# Altium PCB RTL8201CP.PcbDoc
Units mm, origin at the board's own origin, x right, y up, seen from the top; angles counter-clockwise.
Board outline 50 x 24 mm, 2 copper layers (Top Layer, Bottom Layer), stack 0.246 mm thick; 39 components, 39 nets, 159 pads, 125 vias.
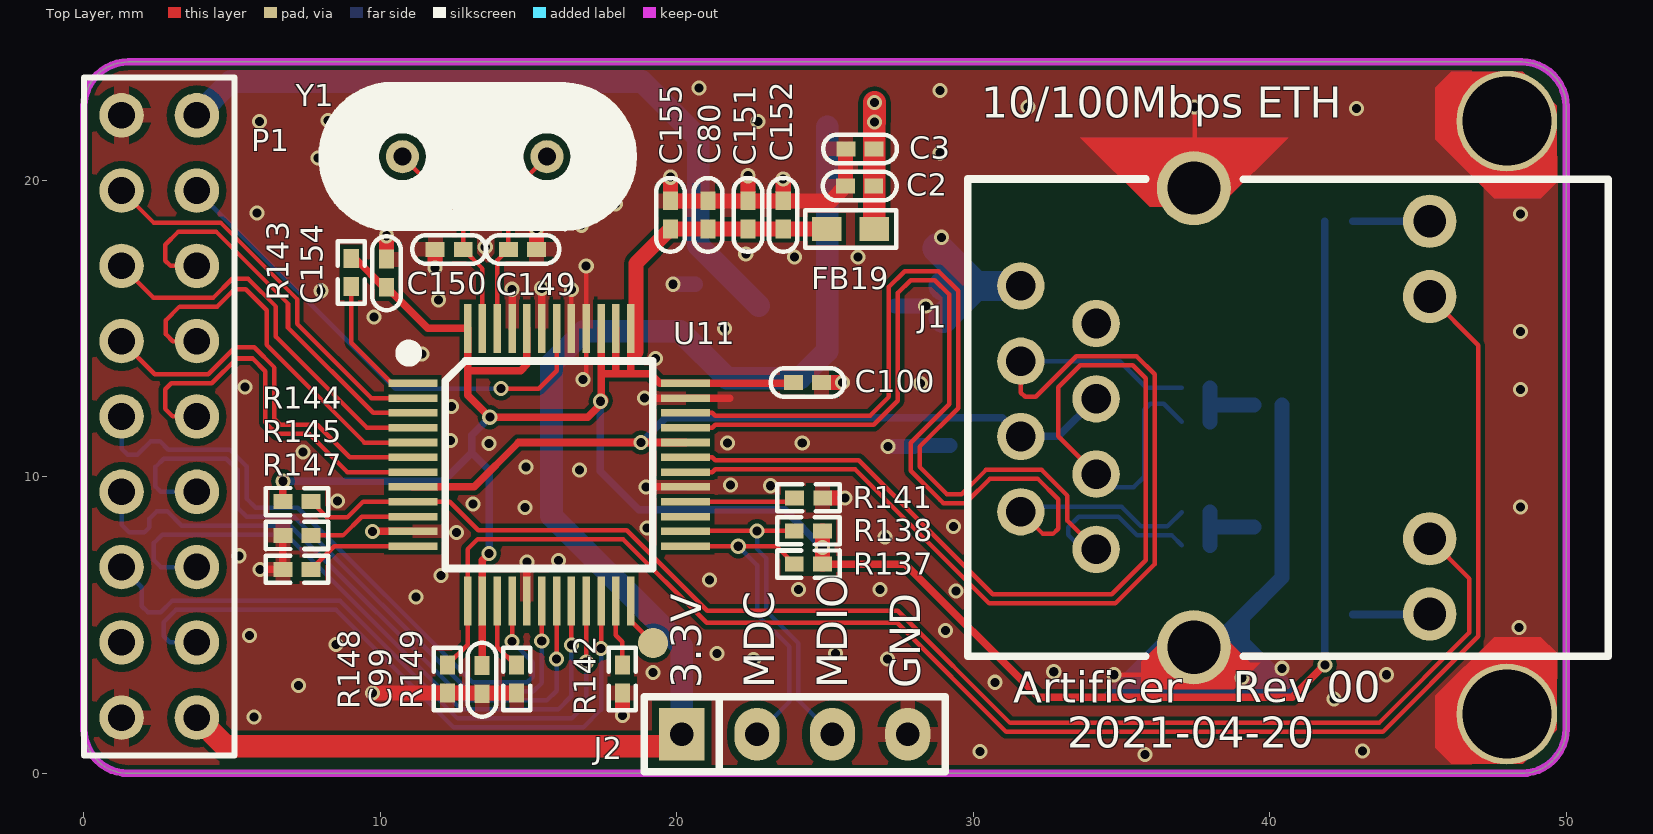
[diagram p0: Top Layer view]
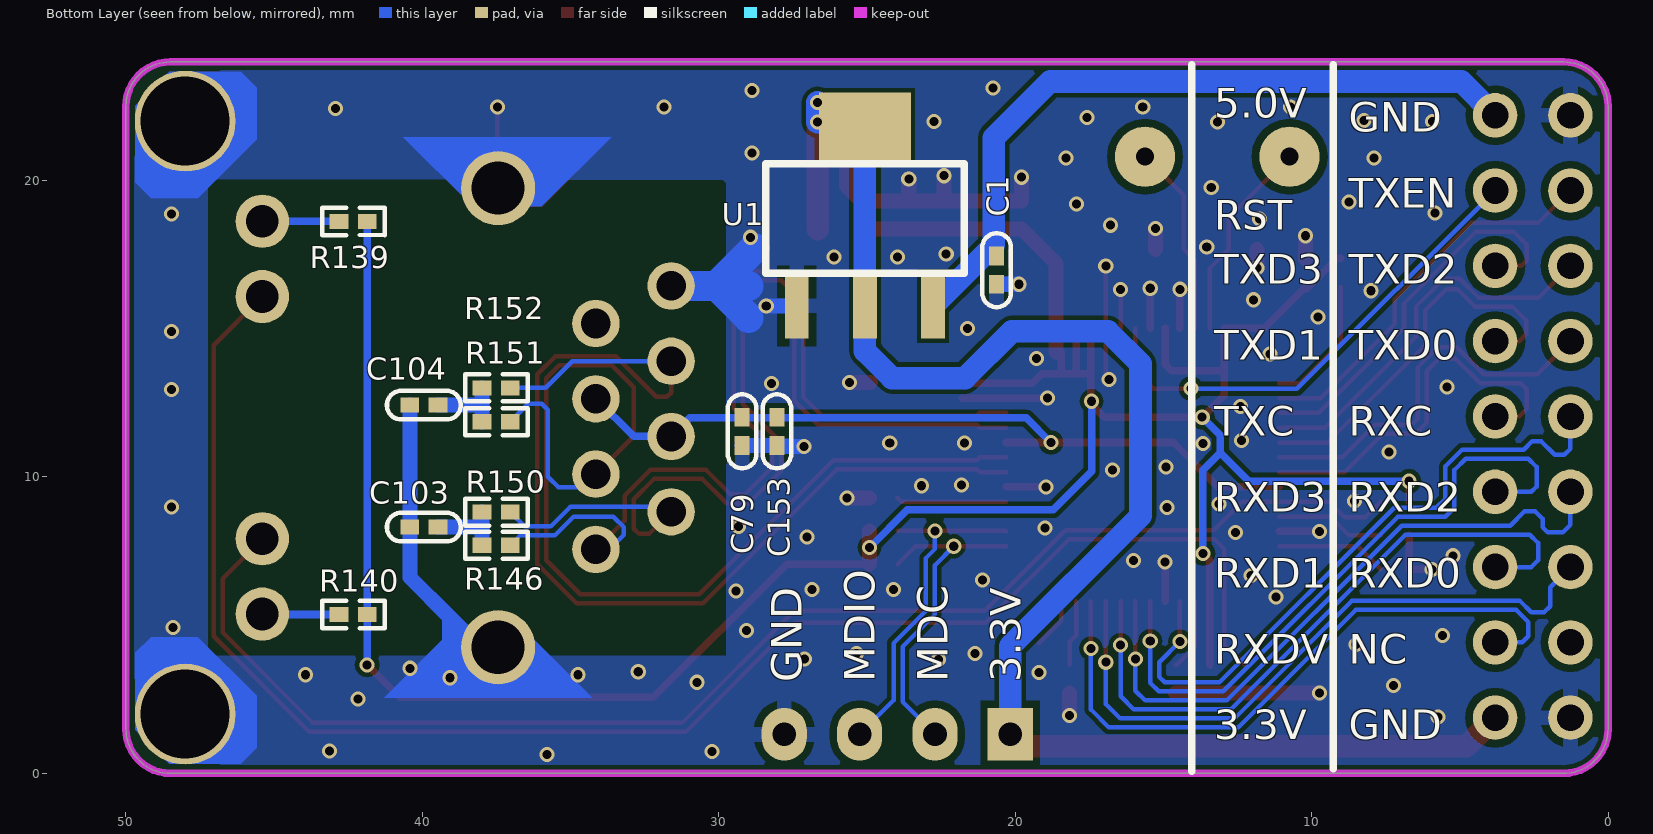
[diagram p1: Bottom Layer view, seen from below]

## Layer stack, top to bottom
Top Solder: solder mask 0.0127, Solder Resist, Dk 3.5
Top Layer: signal copper 0.0356
Dielectric 1: core 0.175, 7628, Dk 4.29
Bottom Layer: signal copper 0.0356
Bottom Solder: solder mask 0.0127, Solder Resist, Dk 3.5

## Board outline
0,1.5 0,22.5 cw(c1.5,22.5) 1.5,24 48.5,24 cw(c48.5,22.5) 50,22.5 50,1.5 cw(c48.5,1.5) 48.5,0 1.5,0 cw(c1.5,1.5)

## Design rules (kind name [scope] priority, off if disabled: settings)
Clearance [All] p1: gap=0.152 except(0.254: THPad-Fill THPad-Poly Fill-Fill Poly-Poly)
ComponentClearance [All] p1 off: gap=0.152 collisioncheckmode=3 verticalgap=0.152 showdistances=FALSE
DiffPairsRouting [All] p1: maxlimit=0.152 minlimit=0.152 mostfreqgap=0.152 toplayer_minwidth=0.152 toplayer_maxwidth=0.152 toplayer_prefwidth=0.152 bottomlayer_minwidth=0.152 bottomlayer_maxwidth=0.152 bottomlayer_prefwidth=0.152 maxuncoupledlength=12.7
Height [All] p1: minheight=0 maxheight=35 prefheight=12.7
HoleSize [All] p1: absolutevalues=TRUE maxlimit=3.5 minlimit=0.2 maxpercent=80.000 minpercent=20.000
HoleToHoleClearance [All] p1 off: gap=0.254 allowstackedmicrovias=TRUE
Length [InNet('DDR2_A0')] p1: maxlimit=36 minlimit=0
Length InNet('DDR2_A0') [InNet('DDR2_A0')] p2: maxlimit=33.585 minlimit=0
Length InNet('DDR2_A4') [InNet('DDR2_A0')] p3: maxlimit=33.585 minlimit=0
Length "InNet('DDR2_A0') Or InNet('DDR2_A4')" [InNet('DDR2_A2')] p4: maxlimit=33.585 minlimit=0
MinimumSolderMaskSliver [All] p1 off: minsoldermaskwidth=0.254
PolygonConnect PolygonConnect_GND [IsVia] p1: connectstyle=Direct reliefconductorwidth=0.254 reliefentries=4 polygonreliefangle="90 Angle" airgapwidth=0.254
PolygonConnect [All] p2: connectstyle=Relief reliefconductorwidth=0.508 reliefentries=4 polygonreliefangle="90 Angle" airgapwidth=0.254
RoutingVias [All] p1: holewidth=0.305 width=0.508 viastyle="Through Hole" minholewidth=0.305 minwidth=0.508 maxholewidth=0.762 maxwidth=1.27
SilkToSilkClearance [All] p1 off: silktosilkclearance=0.254
SilkToSolderMaskClearance [IsPad] p1 off: minsilkscreentomaskgap=0.254 clearancetoexposedcopper=TRUE
SolderMaskExpansion [All] p1: expansion=0.102
Width [All] p1: maxlimit=2 minlimit=0.152 preferedwidth=0.152
22 further rules are at their usual default settings.

## Classes and differential pairs
net class ETH_RX: TPRX_N TPRX_P
net class ETH_TX: TPTX_N TPTX_P
net class MII_TX: ETH_TXC ETH_TXD0 ETH_TXD1 ETH_TXD2 ETH_TXD3 ETH_TXEN
net class MII_RX: ETH_RXC ETH_RXD0 ETH_RXD1 ETH_RXD2 ETH_RXD3 ETH_RXDV
differential pair TPTX: +TPTX_P -TPTX_N
differential pair TPRX: +TPRX_P -TPRX_N

## Components (designator, comment, footprint, x,y, rotation, side; value= is the part's Value field where it differs from the comment)
C1 "10uF/10V" 0402C 20.617,16.492 r90 bottom
C2 "10uF/10V" 0402C 25.687,19.804 r0 top
C3 "0.1uF/16V" 0402C 25.698,21.06 r0 top
C79 "0.1uF/16V" 0402C 29.202,11.057 r90 bottom
C80 "0.1uF/16V" 0402C 21.042,19.322 r270 top
C99 "0.1uF/16V" 0402C 13.438,2.677 r90 top
C100 "0.1uF/16V" 0402C 24.893,13.19 r180 top
C103 "0.1uF/16V" 0402C 40.429,8.298 r180 bottom
C104 "0.1uF/16V" 0402C 40.429,12.413 r180 bottom
C149 "20pF/50V" 0402C 14.311,17.671 r0 top
C150 "20pF/50V" 0402C 11.837,17.671 r0 top
C151 "10uF/10V" 0402C 22.389,19.322 r270 top
C152 "0.1uF/16V" 0402C 23.582,19.322 r270 top
C153 "2.2uF/10V" 0402C 28.034,11.057 r90 bottom
C154 "0.1uF/16V" 0402C 10.203,17.356 r270 top
C155 "0.1uF/16V" 0402C 19.772,19.322 r270 top
FB19 "120R_3A" 0603 26.663,18.364 r180 top
J1 "HR911105A_C12074" RJ45-TH_HR911105A 38.5,12 r90 top locked
J2 "SIP4" SIP4 23.978,1.321 r0 top locked
P1 "Header 9X2" HDR2X9 1.27,22.2 r270 top locked
R137 "10K" 0402R 24.428,7.061 r0 top
R138 "10K" 0402R 24.428,8.179 r0 top
R139 "330R" 0402R 42.342,18.618 r180 bottom
R140 "330R" 0402R 42.342,5.359 r180 bottom
R141 "6.8K" 0402R 24.454,9.296 r180 top
R142 "10K" 0402R 18.161,3.192 r270 top
R143 "10K" 0402R 9.017,16.891 r90 top
R144 "10K" 0402R 7.197,9.169 r180 top
R145 "10K" 0402R 7.197,8.026 r180 top
R146 "49.9R±1%" 0402R 37.516,7.696 r180 bottom
R147 "10K" 0402R 7.197,6.883 r180 top
R148 "10K" 0402R 12.262,3.192 r270 top
R149 "10K" 0402R 14.598,3.192 r270 top
R150 "49.9R±1%" 0402R 37.516,8.814 r180 bottom
R151 "49.9R±1%" 0402R 37.516,11.862 r180 bottom
R152 "49.9R±1%" 0402R 37.516,13.005 r180 bottom
U1 "AMS1117-1.8V" SOT-223 27.362,15.765 r180 bottom
U11 "RTL8201CP" lqfp48s 11.084,13.154 r0 top locked
Y1 "25MHz" HC-49S 15.646,20.777 r180 top

## Footprints (in the part's own frame and the unit in brackets; to place one, negate y for a bottom-side part, rotate by r counter-clockwise, add the part's x,y. Pads: shape width x height; smd on the part's side, far side on the other; paste and mask are expansions set on the pad)
0402C [mil]
  rect 25x20 smd: 1(0.3,0.3) 2(37.7,0.3)
  silkscreen extent -30,-19 68,19
0402R [mil]
  rect 25x20 smd: 1(-18.4,0) 2(19,0)
  silkscreen extent -41,-18 42,18
0603 [mm]
  rect 1x0.8 smd: 1(0,0) 2(1.6,0)
  silkscreen extent -0.74,-0.64 2.34,0.64, body extent -0.04,-0.4 1.56,0.4, height 0.45
HC-49S [mil]
  round 44 / inner round 100 / far side round 80 hole 24: 1(1,-1) 2(193,-1)
  silkscreen extent -115,-96 301,94
HDR2X9 [mm] "Connector; Header; 9x2 Position"
  round 1.5 hole 0.9: 1(0,0) 2(0,2.54) 3(2.54,0) 4(2.54,2.54) 5(5.08,0) 6(5.08,2.54) 7(7.62,0) 8(7.62,2.54) 9(10.16,0) 10(10.16,2.54) 11(12.7,0) 12(12.7,2.54) 13(15.24,0) 14(15.24,2.54) 15(17.78,0) 16(17.78,2.54) 17(20.32,0) 18(20.32,2.54)
  silkscreen extent -1.27,-1.27 21.59,3.81
lqfp48s [mil]
  rect 65x10 smd: 1(0.42,0.29) 2(0.42,-19.39) 3(0.42,-39.08) 4(0.42,-58.76) 5(0.42,-78.45) 6(0.42,-98.13) 7(0.42,-117.82) 8(0.42,-137.5) 9(0.42,-157.19) 10(0.42,-176.87) 11(0.42,-196.56) 12(0.42,-216.24) 25(362.63,-216.24) 26(362.63,-196.56) 27(362.63,-176.87) 28(362.63,-157.19) 29(362.63,-137.5) 30(362.63,-117.82) 31(362.63,-98.13) 32(362.63,-78.45) 33(362.63,-58.76) 34(362.63,-39.08) 35(362.63,-19.39) 36(362.63,0.29)
  rect 10x65 smd: 13(73.26,-289.08) 14(92.94,-289.08) 15(112.63,-289.08) 16(132.31,-289.08) 17(152,-289.08) 18(171.68,-289.08) 19(191.37,-289.08) 20(211.05,-289.08) 21(230.74,-289.08) 22(250.42,-289.08) 23(270.11,-289.08) 24(289.79,-289.08) 37(289.79,73.13) 38(270.11,73.13) 39(250.42,73.13) 40(230.74,73.13) 41(211.05,73.13) 42(191.37,73.13) 43(171.68,73.13) 44(152,73.13) 45(132.31,73.13) 46(112.63,73.13) 47(92.94,73.13) 48(73.26,73.13)
  silkscreen extent -10,-246 319,46
RJ45-TH_HR911105A [mm]
  round 1.6 hole 1: 1(-4.445,4.355) 2(-3.175,6.895) 3(-1.905,4.355) 4(-0.635,6.895) 5(0.635,4.355) 6(1.905,6.895) 7(3.175,4.355) 8(4.445,6.895)
  round 1.8 hole 1.1: 9(-6.625,-6.895) 10(-4.085,-6.895) 11(4.085,-6.895) 12(6.625,-6.895)
  round 2.5 hole 1.8: SH1(-7.745,1.055) SH2(7.745,1.055)
  silkscreen extent -8.05,-12.92 8.05,8.68
SIP4 [mil]
  rect 60x70 hole 31.5: 1(-150,0)
  oval 60x70 hole 31.5: 2(-50,0) 3(50,0) 4(150,0)
  silkscreen extent -200,-50 200,50
SOT-223 [mm]
  rect 0.8x2.2 smd: 1(-0.008,0.004) 2(2.292,0.004) 3(4.592,0.004)
  rect 3.1x2.3 smd: 4(2.292,6.054)
  silkscreen extent -1.06,1.1 5.64,4.8

## Part data
C1 C2 C151: library part CT41-25V-0805-106, "10uF_10%_X5R_25V"
C3 C79 C80 C99 C100 C152 C153 C154 C155: library part CT41-50V-0805-104, "0.1uF_10%_X5R_50V"
C103 C104 C149 C150: library part CAP, "Capacitor"
FB19: library part FB-90R-100Mhz
J2: library part CON4
P1: "Header, 9-Pin, Dual row"
R137 R138 R141 R142 R143 R144 R145 R147 R148 R149: library part RC-0805-0R, "0R_5%_1/16W"
R139 R140 R146 R150 R151 R152: library part RES
U1: "稳压器1.8V"
U11: "ETH PHY"
Y1: library part CRYES

## Free pads (board coordinates)
  round 3.4 hole 3: 1(48,2) 1(48,22)
  round 1.016 smd: 2(19.202,4.394)

## Via types
v1: diameter 0.508, hole 0.305, Top Layer to Bottom Layer, tented both sides, 125 vias

## Nets (pads, with @x,y where several pads share a name; then routed paths per layer and width w, separated by ;. In a path a pad name is that pad's centre, name@x,y a point inside that pad or via, vN(x,y) a via of type N, cw(c..) or ccw(c..) an arc to the next point about the centre after c; other vN are vias at no path point)
ATC_LED1: J1.11 R148.1 U11.13 | length 54.6
  Top Layer w0.152: R148.1 12.945,4.343 U11.13 12.945,7.566 13.278,7.9 18.187,7.9 21.008,5.08 27.434,5.08 31.116,1.398 43.814,1.398 47.04,4.624 47.04,14.44 J1.11
ETH_MDC: J2.2 R137.1 U11.25 | length 11.4
  Top Layer w0.152: U11.25 v1(22.073,7.661) 23.361,7.661 R137.1
  Bottom Layer w0.152: v1(22.073,7.661) 22.708,7.026 22.708,5.361 23.8,4.269 23.8,2.413 J2.2
ETH_MDIO: J2.3 R138.1 U11.26 | length 11.6
  Top Layer w0.152: U11.26 20.312,8.179 v1(22.708,8.179) 23.926,8.179 23.943,8.161 R138.1
  Bottom Layer w0.152: v1(22.708,8.179) 22.708,7.569 23.012,7.265 23.012,5.487 24.104,4.395 24.104,2.465 J2.3
ETH_RESET: P1.4 U11.42 | length 16.6
  Top Layer w0.152: v1(14.072,12.979) 15.342,12.979 15.945,13.582 U11.42
  Bottom Layer w0.152: P1.4 10.497,12.973 v1@14.072,12.973
ETH_RXC: P1.9 U11.16 | length 22.2
  Top Layer w0.152: v1(14.445,4.446) U11.16
  Bottom Layer w0.152: P1.9 1.27,10.947 1.473,10.744 1.803,10.744 2.261,11.201 2.565,11.201 2.845,10.922 4.926,10.922 5.486,10.362 5.486,9.272 5.793,8.965 7.213,8.965 13.109,3.069 14.957,3.069 15.141,3.253 15.141,3.75 v1(14.445,4.446)
ETH_RXD0: P1.13 U11.21 | length 22.2
  Top Layer w0.152: v1(16.945,3.75) U11.21
  Bottom Layer w0.152: P1.13 1.956,6.274 1.956,5.639 2.159,5.436 2.593,5.436 2.974,5.817 8.642,5.817 12.605,1.853 16.458,1.853 16.945,2.34 v1(16.945,3.75)
ETH_RXD1: P1.14 U11.20 | length 22.2
  Top Layer w0.152: v1(16.445,4.326) U11.20
  Bottom Layer w0.152: P1.14 2.591,6.96 2.362,7.188 2.362,7.772 2.642,8.053 6.836,8.053 12.731,2.157 16,2.157 16.445,2.602 v1(16.445,4.326)
ETH_RXD2: P1.11 U11.19 | length 22.2
  Top Layer w0.152: v1(15.945,3.861) U11.19
  Bottom Layer w0.152: P1.11 1.27,8.382 1.524,8.128 2.032,8.128 2.21,8.306 2.21,8.585 2.464,8.839 2.819,8.839 3.302,8.357 6.961,8.357 12.857,2.461 15.619,2.461 15.945,2.787 v1(15.945,3.861)
ETH_RXD3: P1.12 U11.18 | length 22.2
  Top Layer w0.152: v1(15.445,4.462) U11.18
  Bottom Layer w0.152: P1.12 2.591,9.5 2.413,9.677 2.413,10.338 2.693,10.618 4.8,10.618 5.182,10.236 5.182,8.966 5.487,8.661 7.087,8.661 12.983,2.765 15.161,2.765 15.445,3.049 v1(15.445,4.462)
ETH_RXDV: P1.16 U11.22 | length 22.2
  Top Layer w0.152: v1(17.445,4.218) U11.22
  Bottom Layer w0.152: P1.16 2.896,4.42 2.692,4.623 2.692,5.105 3.1,5.513 8.516,5.513 12.479,1.549 16.84,1.549 17.445,2.154 v1(17.445,4.218)
ETH_TXC: P1.10 U11.7 | length 13.2
  Top Layer w0.152: P1.10 2.997,12.04 2.743,12.294 2.743,12.954 2.947,13.158 4.317,13.158 5.154,13.995 5.691,13.995 6.122,13.565 6.122,11.837 6.504,11.455 7.595,11.455 8.889,10.161 U11.7
ETH_TXD0: P1.7 U11.6 | length 13.2
  Top Layer w0.152: P1.7 2.388,13.462 4.191,13.462 5.105,14.376 5.74,14.376 6.426,13.691 6.426,11.963 6.63,11.759 7.875,11.759 8.973,10.661 U11.6
ETH_TXD1: P1.8 U11.5 | length 13.2
  Top Layer w0.152: P1.8 2.997,14.58 2.769,14.808 2.769,15.291 3.227,15.749 4.497,15.749 5.081,16.333 5.462,16.333 6.173,15.622 6.173,14.452 9.463,11.161 U11.5
ETH_TXD2: P1.5 U11.4 | length 13.2
  Top Layer w0.152: P1.5 2.337,16.053 4.369,16.053 5.004,16.688 5.537,16.688 6.477,15.748 6.477,14.732 9.548,11.661 U11.4
ETH_TXD3: P1.6 U11.3 | length 13.2
  Top Layer w0.152: P1.6 2.921,17.12 2.743,17.297 2.743,17.831 3.176,18.263 4.47,18.263 6.884,15.849 6.884,15.036 9.759,12.161 U11.3
ETH_TXEN: P1.3 U11.2 | length 13.2
  Top Layer w0.152: P1.3 2.362,18.567 4.623,18.567 7.188,16.002 7.188,15.164 9.691,12.661 U11.2
GND: C1.1 C2.1 C3.1 C79.1 C80.1 C99.1 C100.1 C103.1 C104.1 C149.2 C150.1 C151.1 C152.1 C153.1 C154.1 C155.1 J1.8 J1.SH1 J1.SH2 J2.4 P1.1 P1.17 pad.1 R141.1 R142.2 R145.2 R147.2 R148.2 R149.2 U1.1 U11.11 U11.17 U11.29 U11.35 U11.40 U11.41 U11.43 U11.45 | length 63.4
  Top Layer w0.152: U11.41 v1(16.445,16.321) ; v1(16.84,13.284) 16.945,13.389 U11.40 v1(16.945,17.117) ; v1(34.747,3.327) 36.517,3.327 J1.SH1 38.036,4.255 v1(39.065,3.226) ; J1.SH2 37.465,19.765 v1(37.465,22.479)
  Top Layer w0.254: v1(5.944,6.883) R147.2 R145.2 ; v1(9.73,8.161) U11.11 ; U11.45 v1(14.445,16.331) ; U11.17 v1(14.945,7.137) ; U11.43 v1(15.445,16.366) ; v1(18.903,12.661) U11.35 21.781,12.661 ; v1(18.958,9.661) U11.29
  Top Layer w0.508: v1(9.736,2.71) R148.2 R149.2 ; C154.1 v1(10.211,18.136) ; v1(11.845,17.052) C150.1 ; C149.2 v1(15.269,18.386) ; v1(18.161,1.956) R142.2 ; v1(19.78,20.11) C155.1 C80.1 C151.1 ; v1(22.396,20.161) C151.1 ; v1(23.59,20.047) C152.1 ; C100.1 v1(25.597,13.183) ; R141.1 v1(25.673,9.296) ; C3.1 25.695,21.057 C2.1 25.197,19.314 C152.1 ; C151.1 C152.1
  Bottom Layer w0.508: v1(19.878,16.5) C1.1 ; v1(27.127,11.024) 28.001,11.024 C153.1 C79.1 ; U1.1 27.375,15.773 v1(28.397,15.773) ; J1.SH1@38.024,4.216 39.078,5.271 ; 39.078,4.381 39.078,5.271 ; C104.1 C103.1 40.422,6.614 39.078,5.271
  Bottom Layer w1.016: 28.804,17.715 30.074,16.445 ; 28.993,16.445 30.074,16.445 ; 28.996,15.367 30.074,16.445 ; J1.8 30.074,16.445
  other v1: 35.789,0.635 30.226,0.737 43.129,0.762 5.74,1.905 42.164,2.515 7.239,2.972 30.734,3.073 43.942,3.327 19.202,3.404 32.715,3.429 40.422,3.546 22.581,3.835 27.102,3.861 21.361,4.039 25.349,4.039 8.509,4.343 5.588,4.648 29.058,4.826 48.412,4.928 11.201,5.944 29.413,6.147 24.105,6.198 26.848,6.198 21.107,6.528 12.04,6.68 16.002,7.188 5.232,7.341 27.026,7.976 12.573,8.128 18.999,8.28 29.337,8.331 14.884,8.966 48.463,8.992 13.132,9.093 8.56,9.195 23.165,9.703 21.819,9.728 16.713,10.236 14.91,10.338 7.391,10.846 13.665,11.125 21.717,11.151 24.232,11.151 12.37,11.227 12.395,12.37 48.463,12.954 5.436,13.03 28.219,13.157 19.279,13.995 11.405,14.148 48.463,14.91 21.615,15.011 9.779,15.392 11.963,15.977 8.001,16.281 23.978,17.424 26.111,17.424 22.327,17.526 13.538,17.755 28.931,18.085 16.789,18.491 11.76,18.694 48.463,18.872 5.842,18.898 17.932,19.202 8.738,19.279 13.386,19.761 7.899,20.752 18.288,20.752 28.88,20.93 13.183,21.971 5.918,21.996 22.733,21.996 8.23,22.022 17.577,22.123 42.926,22.428 10.719,22.479 15.697,22.479 31.852,22.479 28.88,23.038 20.752,23.114
LINK_LED1: J1.10 R144.1 U11.9 | length 47.6
  Top Layer w0.152: R144.1 8.198,8.636 8.89,8.636 9.415,9.161 U11.9 12.346,9.161 13.303,8.204 18.313,8.204 21.031,5.486 27.457,5.486 31.242,1.702 43.688,1.702 46.736,4.75 46.736,6.574 J1.10
NetC103_2: C103.2 R146.1 R150.1 | length 2.6
  Bottom Layer w0.508: R146.1 37.983,8.255 ; R150.1 37.983,8.255 ; C103.2 38.034,8.306 37.983,8.255
NetC104_2: C104.2 R151.1 R152.1 | length 2.6
  Bottom Layer w0.508: R151.1 37.983,12.421 ; R152.1 37.983,12.421 ; C104.2 37.983,12.421
NetJ1_9: J1.9 R140.1 | length 2.6
  Bottom Layer w0.254: R140.1 45.379,5.359 J1.9
NetJ1_12: J1.12 R139.1 | length 2.6
  Bottom Layer w0.254: R139.1 45.388,18.618 J1.12
NetR141_2: R141.2 U11.28 | length 3.7
  Top Layer w0.152: U11.28 23.836,9.161 R141.2
NetR142_1: R142.1 U11.23 | length 2.2
  Top Layer w0.152: U11.23 17.945,4.661 18.161,4.445 R142.1
NetR143_1: R143.1 U11.1 | length 4.5
  Top Layer w0.152: R143.1 9.017,14.529 10.384,13.161 U11.1
NetR145_1: R145.1 U11.10 | length 3.7
  Top Layer w0.152: R145.1 8.738,8.026 9.373,8.661 U11.10
NetR147_1: R147.1 U11.12 | length 3.8
  Top Layer w0.152: R147.1 8.442,7.661 U11.12
NetR149_1: R149.1 U11.15 | length 2.5
  Top Layer w0.152: U11.15 13.945,4.265 14.55,3.66 R149.1
REGOUT: C79.2 C153.2 J1.4 J1.5 U11.8 U11.32 | length 26.3
  Top Layer w0.254: U11.8 13.16,9.661 14.66,11.161 v1(18.796,11.161) U11.32
  Bottom Layer w0.254: v1(18.796,11.161) 19.623,11.989 30.981,11.989 J1.4 32.875,11.365 J1.5
RXER: pad.2 U11.24 | length 1.7
  Top Layer w0.152: U11.24 18.445,5.152 pad.2
TPRX_N: J1.6 R152.2 U11.30 | length 36.8
  Top Layer w0.152: U11.30 21.196,10.161 21.294,10.259 26.014,10.259 30.533,5.74 34.798,5.74 36.119,7.061 36.119,13.46 35.508,14.071 33.478,14.071 32.107,12.7 31.75,12.7 31.605,12.845 J1.6@31.605,13.721
  Bottom Layer w0.152: J1.6 34.939,13.905 35.839,13.005 R152.2
TPRX_P: J1.3 R151.2 U11.31 | length 36.8
  Top Layer w0.152: U11.31 21.196,10.661 21.294,10.563 26.14,10.563 30.659,6.044 34.672,6.044 35.815,7.187 35.815,13.334 35.382,13.767 33.604,13.767 32.868,13.03 32.868,11.372 J1.3
  Bottom Layer w0.152: J1.3 34.588,9.652 35.408,9.652 35.763,10.008 35.763,12.268 35.966,12.471 36.424,12.471 R151.2
TPTX_N: J1.2 R150.2 U11.33 | length 34.4
  Top Layer w0.152: U11.33 21.196,11.661 21.294,11.759 26.644,11.759 27.457,12.572 27.457,16.206 27.888,16.638 28.703,16.638 29.185,16.155 29.185,12.447 27.89,11.151 27.89,10.212 28.893,9.208 28.982,9.119 29.742,9.119 29.831,9.208 30.555,9.932 32.183,9.932 32.868,9.247 32.868,8.255 32.69,8.077 32.353,8.077 J1.2
  Bottom Layer w0.152: J1.2 31.772,8.992 35.001,8.992 35.662,8.33 36.55,8.33 R150.2
TPTX_P: J1.1 R146.2 U11.34 | length 34.4
  Top Layer w0.152: U11.34 21.196,12.161 21.294,12.063 26.518,12.063 27.153,12.698 27.153,16.408 27.686,16.942 28.829,16.942 29.489,16.281 29.489,12.321 28.194,11.025 28.194,10.338 29.108,9.423 29.616,9.423 30.429,10.236 32.309,10.236 33.172,9.373 33.172,8.528 J1.1
  Bottom Layer w0.152: J1.1@34.286,7.696 J1.1 33.695,7.555 33.198,8.052 33.198,8.306 33.553,8.661 34.9,8.661 35.535,8.026 36.703,8.026 R146.2
VCC3.3: C2.2 C3.2 FB19.1 J2.1 P1.18 U1.2 U1.4 | length 54.5
  Top Layer w0.762: P1.18 4.775,0.914 19.761,0.914 J2.1 ; FB19.1 26.663,21.964 v1(26.67,21.971) v1(26.67,22.631)
  Bottom Layer w0.762: J2.1 20.168,4.293 15.773,8.687 15.773,13.818 16.866,14.91 20.117,14.91 21.692,13.335 24.155,13.335 25.07,14.249 U1.2 U1.4 ; v1(26.67,21.971) v1(26.67,22.631)
VCC3.3_ETH: C80.2 C99.2 C100.2 C151.2 C152.2 C154.2 C155.2 FB19.2 R137.2 R138.2 R139.2 R140.2 R143.2 R144.2 U11.14 U11.36 U11.37 U11.38 U11.39 U11.44 U11.48 | length 99.5
  Top Layer w0.152: C99.2 C99.2@13.445,3.649 ; C100.2@23.914,13.161 C100.2
  Top Layer w0.254: R144.2 v1(6.714,9.855) ; R143.2 9.144,17.374 C154.2@10.165,16.353 ; C154.2 11.598,15.011 U11.48 12.945,13.614 ; C99.2@13.445,3.649 U11.14 13.445,7.196 v1(13.665,7.417) ; U11.44 14.945,13.802 14.732,13.589 12.97,13.589 12.945,13.614 ; U11.39 17.445,13.487 ; U11.38 17.945,13.5 17.932,13.487 ; U11.37@18.445,14.224 18.445,13.492 18.44,13.487 ; C100.2@23.914,13.161 U11.36 19.427,13.161 19.101,13.487 18.44,13.487 ; R137.2 27.711,7.061 32.207,2.565 40.767,2.565 v1(41.859,3.658) ; 12.945,13.614 12.945,12.76 v1(13.691,12.014) 16.993,12.014 17.445,12.466 17.445,12.573 17.445,13.487 ; 17.445,13.487 17.932,13.487 ; 17.932,13.487 18.44,13.487
  Top Layer w0.508: v1(17.424,12.553) v1@17.445,12.573 ; 18.618,14.224 18.618,17.202 C155.2 C80.2 FB19.2 ; R137.2 v1(24.911,7.62) R138.2
  Bottom Layer w0.254: v1(6.714,9.855) 12.124,9.855 13.081,10.812 ; v1(13.665,7.417) 13.665,10.228 13.081,10.812 ; v1(13.691,12.014) 13.081,11.405 13.081,10.812 ; v1(17.424,12.553) 17.424,10.185 18.72,8.89 23.641,8.89 v1(24.911,7.62) ; v1(41.859,3.658) R140.2 R139.2
VCC5.0: C1.2 P1.2 U1.3 | length 24.7
  Bottom Layer w0.762: P1.2 4.95,23.34 18.824,23.34 20.726,21.438 20.726,17.812 U1.3
XTLN1: C149.1 U11.46 Y1.1 | length 6.5
  Top Layer w0.152: U11.46 13.945,17.304 C149.1 14.319,19.501 Y1.1
XTLP1: C150.2 U11.47 Y1.2 | length 6.9
  Top Layer w0.152: Y1.2 12.795,18.752 C150.2 13.445,17.029 U11.47
pads on no net: J1.7 P1.15 U11.27

## Polygon pours and split planes (outlines as drawn)
GND on Bottom Layer "Bottom Layer-No Net" (solid, pour order 0): -0.025,0 0.025,-0.051 49.936,-0.051 49.936,23.851 50.038,23.952 49.962,24.028 -0.102,24.028
GND on Top Layer "Bottom Layer-No Net" (solid, remove dead copper, pour order 2): -0.152,-0.051 49.886,-0.051 49.987,0.051 49.936,0.102 49.936,24.206 0.102,24.206 0.025,24.13

## Keep-outs
Keep-Out Layer:
  the board outline again, w0.254

## Other copper
Top Layer:
  region net GND: 47.574,19.403 45.593,21.384 45.593,23.136 46.126,23.67 48.539,23.67 49.682,22.527 49.682,19.936 49.149,19.403
  region net GND: 47.574,4.597 45.593,2.616 45.593,0.864 46.126,0.33 48.539,0.33 49.682,1.473 49.682,4.064 49.149,4.597
  region net GND: 33.61,21.443 35.946,19.106 38.283,19.106 40.62,21.443
  region net GND: 36.678,4.928 36.678,4.775 35.662,3.759 35.662,3.048 35.712,3.048 35.916,2.845 38.786,2.845 39.675,3.734 39.345,3.734 37.998,5.08
  pour cut-out: 29.87,20.015 29.769,19.914 29.769,3.988 47.168,3.988 47.219,3.937 47.219,20.041
Bottom Layer:
  region net GND: 47.574,19.403 45.593,21.384 45.593,23.136 46.126,23.67 48.539,23.67 49.682,22.527 49.682,19.936 49.149,19.403
  region net GND: 47.574,4.597 45.593,2.616 45.593,0.864 46.126,0.33 48.539,0.33 49.682,1.473 49.682,4.064 49.149,4.597
  region net GND: 41.28,2.557 38.944,4.894 36.607,4.894 34.27,2.557
  region net GND: 33.63,21.463 35.966,19.126 38.303,19.126 40.64,21.463
  pour cut-out: 29.87,20.015 29.769,19.914 29.769,3.988 47.168,3.988 47.219,3.937 47.219,20.041

## Silkscreen, mask and mechanical layers (free items; w line width, h text height)
Top Overlay:
  text "10/100Mbps ETH" at 30.277,21.768 h1.8
  text "3.3V" at 20.828,2.87 h1.02 r90
  text "MDC" at 23.292,2.87 h1.02 r90
  text "MDIO" at 25.756,2.87 h1.02 r90
  text "GND" at 28.219,2.87 h1.02 r90
  text "Artificer" at 31.344,2.032 h1.8
  text "Rev 00" at 38.76,2.047 h1.8
  text "2021-04-20" at 33.172,0.508 h1.8
Bottom Overlay:
  lines w0.254: 9.271,0.152 9.271,23.901 ; 14.046,0.076 14.046,23.901
  text "5.0V" at 13.284,22.123 h1
  text "GND" at 8.756,21.641 h1
  text "TXEN" at 8.756,19.079 h1
  text "RST" at 13.284,18.339 h1
  text "TXD2" at 8.756,16.516 h1
  text "TXD3" at 13.284,16.516 h1
  text "TXD0" at 8.756,13.954 h1
  text "TXD1" at 13.284,13.954 h1
  text "RXC" at 8.756,11.392 h1
  text "TXC" at 13.284,11.392 h1
  text "RXD2" at 8.756,8.83 h1
  text "RXD3" at 13.284,8.83 h1
  text "RXD0" at 8.756,6.267 h1
  text "RXD1" at 13.284,6.267 h1
  text "NC" at 8.756,3.705 h1
  text "RXDV" at 13.284,3.705 h1
  text "3.3V" at 19.812,3.073 h1.02 r270
  text "MDC" at 22.276,3.073 h1.02 r270
  text "MDIO" at 24.74,3.073 h1.02 r270
  text "GND" at 27.203,3.073 h1.02 r270
  text "GND" at 8.756,1.143 h1
  text "3.3V" at 13.284,1.143 h1
Drill Drawing:
  text ".Legend" at 51.74,0.305 h2